# EAGLE board mbhp_ainser8_v1 (EAGLE 6.4)
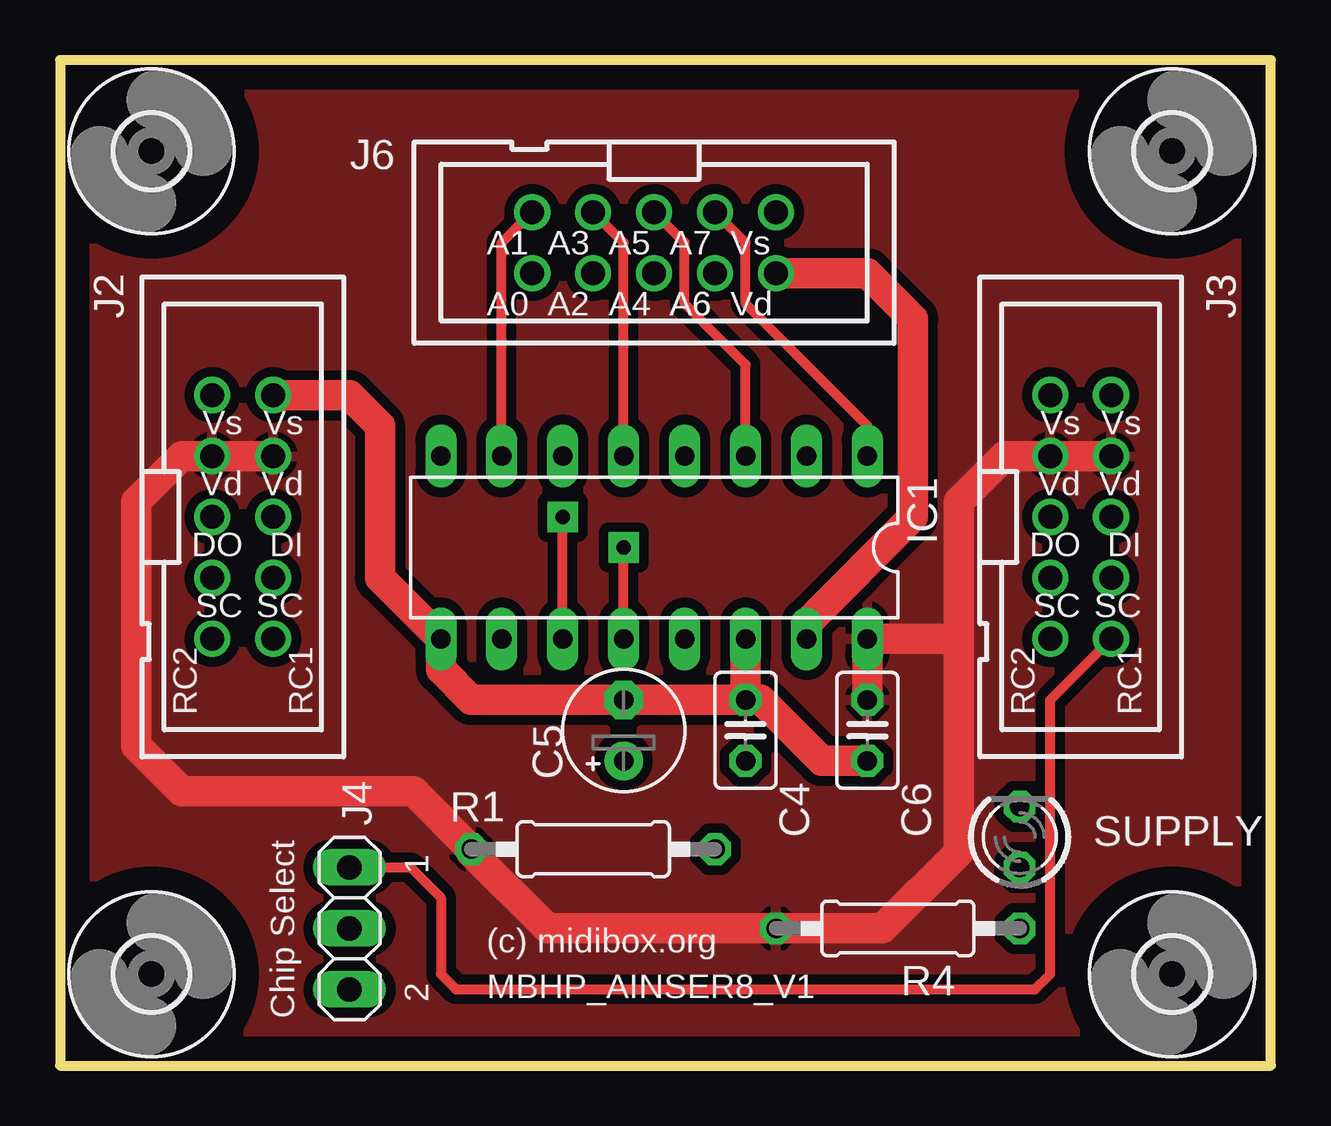
[diagram p0: board, top side]
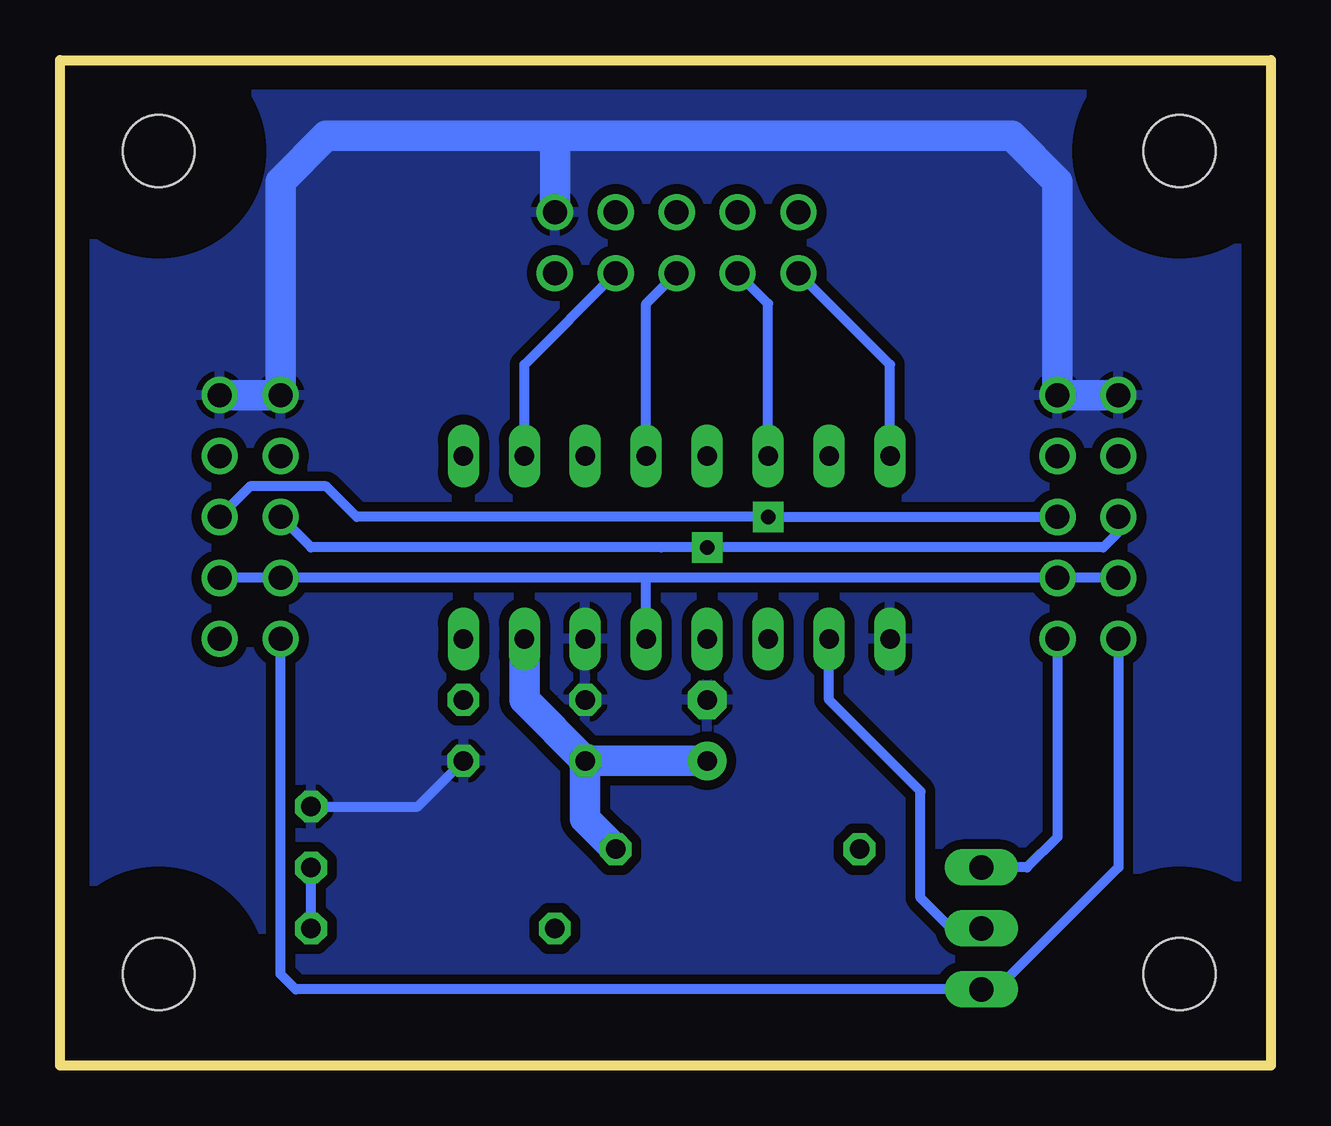
[diagram p1: board, bottom side, seen from below]

Size 50.47 x 41.9 mm. Coordinates in mm from the lower left corner, seen from the top.
Outline: 0,0 50.47,0 50.47,41.9 0,41.9 0,0
Copper layers (1*16): Top 0.035mm / dielectric 1.5mm / Bottom 0.035mm
Design rules "default": minimum track width 10mil, minimum drill 20mil, track to track 8mil, track to pad 8mil, pad to pad 8mil, via to via 8mil, smd to smd 8mil, copper to edge 40mil, drill to drill 8mil, minimum pad ring 10mil, minimum via ring 8mil, stop-mask expansion 4mil, vias tented up to drill 0mil, thermal gap 10mil

## Footprints (pad centres in the part's own frame; a part is rotated, then mirrored left to right if it is on the bottom)
C025-025X050 = drill 0.813 octagon: 1 -1.27,0; 2 1.27,0
E2,5-5 = drill 0.813 pad 1.6: + -1.27,0 | drill 0.813 pad 1.6 octagon: - 1.27,0
3,0 = hole 3: 0,0
DIL16 = drill 0.813 long: 1 -8.89,-3.81; 2 -6.35,-3.81; 3 -3.81,-3.81; 4 -1.27,-3.81; 5 1.27,-3.81; 6 3.81,-3.81; 7 6.35,-3.81; 8 8.89,-3.81; 9 8.89,3.81; 10 6.35,3.81; 11 3.81,3.81; 12 1.27,3.81; 13 -1.27,3.81; 14 -3.81,3.81; 15 -6.35,3.81; 16 -8.89,3.81
PAK100/2500-10 = drill 1 pad 1.422: 1 -5.08,-1.27; 2 -5.08,1.27; 3 -2.54,-1.27; 4 -2.54,1.27; 5 0,-1.27; 6 0,1.27; 7 2.54,-1.27; 8 2.54,1.27; 9 5.08,-1.27; 10 5.08,1.27
1X03 = drill 1.016 long: 1 -2.54,0; 2 0,0; 3 2.54,0
0207/10 = drill 0.813 octagon: 1 -5.08,0; 2 5.08,0
LED3MM = drill 0.813 octagon: A -1.27,0; K 1.27,0

## Placement (x,y rotation side)
C4  100nF  [C025-025X050]  28.57,13.97 270 top
C5  10uF  [E2,5-5]  23.5,13.97 90 top
C6  100nF  [C025-025X050]  33.66,13.97 270 top
E$5  [3,0]  3.81,3.81 0 top
E$6  [3,0]  3.81,38.1 0 top
E$7  [3,0]  46.35,38.1 0 top
E$8  [3,0]  46.35,3.81 0 top
IC1  MCP3208  [DIL16]  24.77,21.59 180 top
J2  [PAK100/2500-10]  7.62,22.86 270 top
J3  [PAK100/2500-10]  42.55,22.86 270 top
J4  [1X03]  12.06,5.71 270 top
J6  [PAK100/2500-10]  24.77,34.29 180 top
R1  10  [0207/10]  22.23,9.02 180 top
R4  470  [0207/10]  34.92,5.71 180 top
SUPPLY  [LED3MM]  40.01,9.53 90 top

## Library data of the parts
C4-C6 R1 R4 = rcl
E$5-E$8 = holes
IC1 = 40xx
J2 J3 J6 = con-3m
J4 = pinhead
SUPPLY = led

## Nets
CH0: IC1.1 J6.3
CH1: IC1.2 J6.4
CH3: IC1.4 J6.6
CH4: IC1.5 J6.7
CH5: IC1.6 J6.8
CH6: IC1.7 J6.9
CH7: IC1.8 J6.10
CS: IC1.10 J4.2
DI: IC1.11 J2.6 J3.6
DO: IC1.12 J2.5 J3.5
GND: C4.1 C5.- C6.2 IC1.9 IC1.14 J2.1 J2.2 J3.1 J3.2 J6.1 SUPPLY.K
RC1: J2.10 J3.10 J4.1
RC2: J2.9 J3.9 J4.3
S$3: IC1.3 J6.5
S$73: R4.1 SUPPLY.A
SC: IC1.13 J2.7 J2.8 J3.7 J3.8
VCA: C4.2 C5.+ IC1.15 J6.2 R1.1
VCC: C6.1 IC1.16 J2.3 J2.4 J3.3 J3.4 R1.2 R4.2

## Tracks (layer width: path | path; a pad name or v marks a point on that pad's centre or on a via)
CH0
  Top 0.406: IC1.1 33.66,26.67 28.57,31.75 28.57,34.29 J6.3
CH1
  Bottom 0.406: IC1.2 31.11,29.21 J6.4
CH3
  Bottom 0.406: IC1.4 26.04,31.75 J6.6
CH4
  Top 0.406: IC1.5 23.5,34.29 J6.7
CH5
  Bottom 0.406: IC1.6 20.95,31.75 J6.8
CH6
  Top 0.406: IC1.7 18.41,34.29 J6.9
CH7
  Bottom 0.406: IC1.8 15.88,29.21 J6.10
CS
  Bottom 0.406: J4.2 13.34,5.71 14.61,6.99 14.61,11.43 18.41,15.24 IC1.10
DI  (via drill 0.6 pad 1.27)
  Top 0.406: IC1.11 v20.95,22.86
  Bottom 0.406: J3.6 42.55,24.13 39.37,24.13 38.1,22.86 v20.95,22.86 J2.6
DO  (via drill 0.6 pad 1.27)
  Top 0.406: IC1.12 v23.5,21.59
  Bottom 0.406: J2.5 6.35,22.23 6.99,21.59 v23.5,21.59 25.4,21.59 40.01,21.59 J3.5
GND
  Top 1.27: J2.2 12.06,27.94 13.34,26.67 13.34,20.32 IC1.9 15.88,16.51 17.14,15.24 C5.- C4.1 | C4.1 29.21,15.24 31.75,12.7 C6.2 | C4.1 IC1.14
  Bottom 0.406: SUPPLY.K 35.56,10.79 C6.2
  Bottom 1.27: J2.1 J2.2 8.89,36.83 10.79,38.73 29.84,38.73 | J3.2 J3.1 41.27,36.83 39.37,38.73 29.84,38.73 | 29.84,38.73 J6.1
  pour Bottom (isolate 0.406): 0,41.91 50.8,41.91 50.16,0 0,0
RC1
  Top 0.406: J4.1 14.61,8.26 15.88,6.99 15.88,3.81 16.51,3.17 40.64,3.17 41.27,3.81 41.27,15.24 J3.10
  Bottom 0.406: J2.10 8.89,9.53 10.16,8.26 J4.1
RC2
  Bottom 0.406: J2.9 6.35,8.26 11.43,3.17 J4.3 40.64,3.17 41.27,3.81 J3.9
S$3
  Top 0.406: IC1.3 28.57,29.21 26.04,31.75 26.04,34.29 J6.5
S$73
  Bottom 0.406: R4.1 SUPPLY.A
SC
  Bottom 0.406: J2.7 J2.8 26.04,20.32 | IC1.13 26.04,20.32 | 26.04,20.32 J3.7 J3.8
VCA
  Top 1.27: IC1.15 31.11,18.41 35.56,22.86 35.56,31.11 33.66,33.02 J6.2
  Bottom 1.27: C5.+ C4.2 | IC1.15 31.11,15.24 C4.2 | C4.2 28.57,10.29 R1.1
VCC
  Top 1.27: J2.3 J2.4 5.08,25.4 3.17,23.5 3.17,13.34 5.08,11.43 14.73,11.43 R1.2 17.14,8.89 20.32,5.71 R4.2 34.29,5.71 37.47,8.89 37.47,17.78 | 37.47,17.78 37.47,23.5 39.37,25.4 J3.3 J3.4 | 37.47,17.78 IC1.16 C6.1
  pour Top (isolate 0.406): 0,41.91 50.16,41.91 50.16,0 0,0

## Text on the board
tNames: A1 | A3 | A5 | A7 | Vs | A0 | A2 | A4 | A6 | A6 | Vd | Vs | Vs | Vs | Vs | Vd | Vd | Vd | Vd | DO | DI | DO | DI | SC | SC | SC | SC | RC2 | RC1 | RC2 | RC1 | Chip Select | 1 | (c) midibox.org | MBHP_AINSER8_V1 | 2